# Altium PCB rf_main.PcbDoc (part 1 of 3)
Units mil, origin at the board's own origin, x right, y up, seen from the top; angles counter-clockwise.
Board outline 7331.84 x 2609.86 mil, 2 copper layers (Top Layer, Bottom Layer); 310 components, 184 nets, 868 pads, 739 vias.
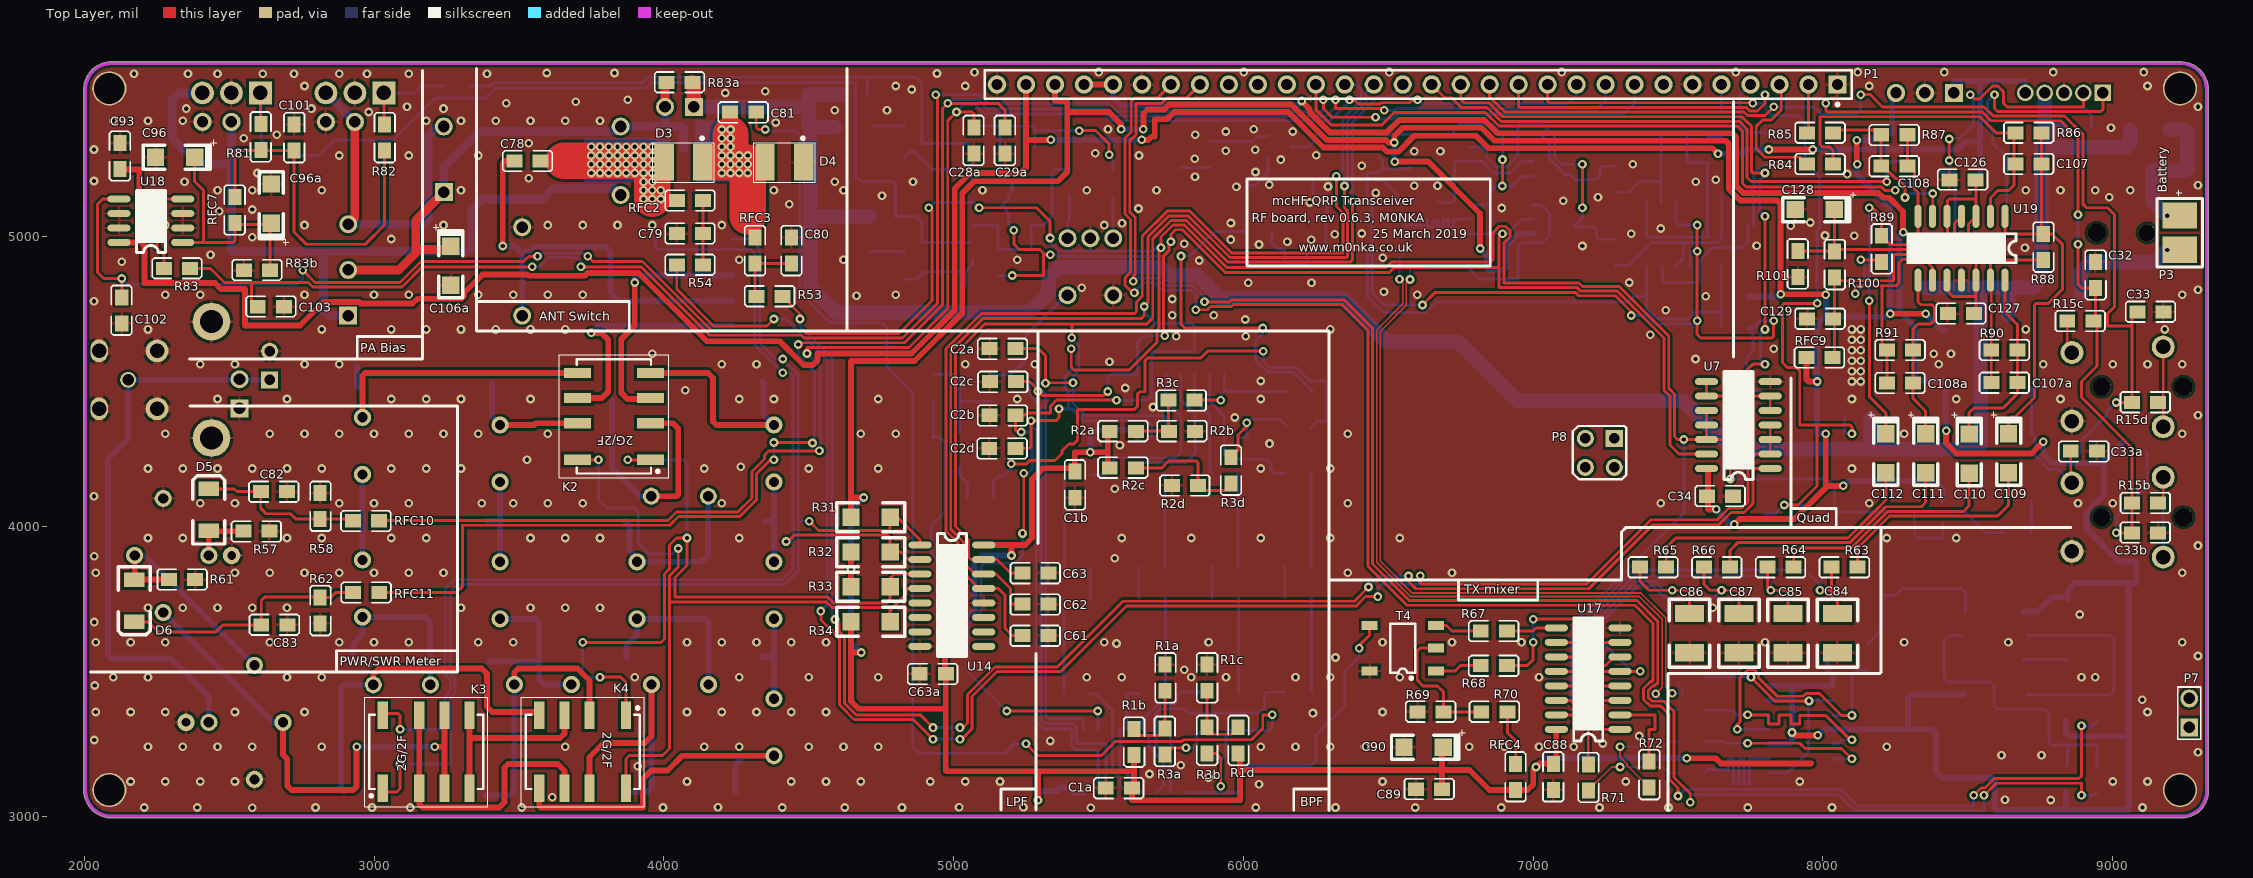
[diagram p0: Top Layer view]
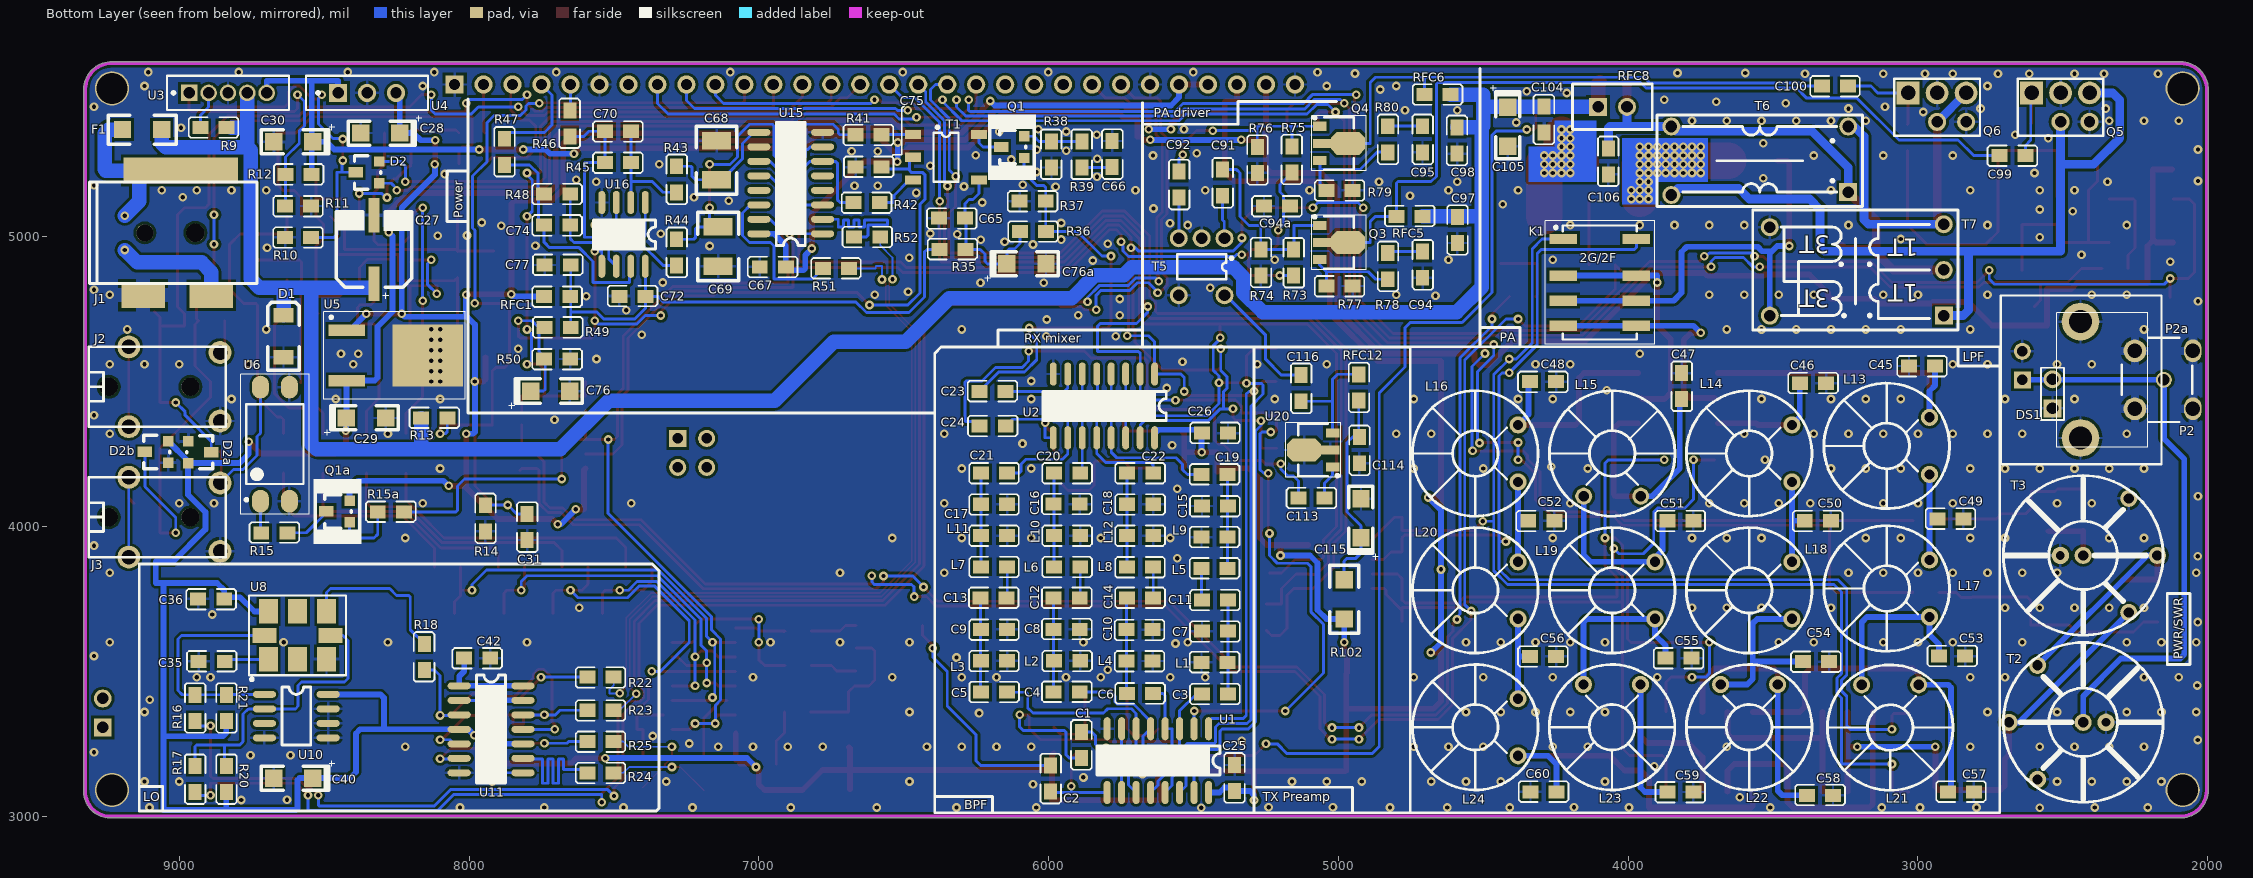
[diagram p1: Bottom Layer view, seen from below]

## Layer stack, top to bottom
Top Solder: solder mask 0.4, Solder Resist, Dk 3.5
Top Layer: signal copper 1.4
Dielectric1: dielectric 12.6, FR-4, Dk 4.8
Bottom Layer: signal copper 1.4
Bottom Solder: solder mask 0.4, Solder Resist, Dk 3.5

## Board outline
1998.08,3088.83 cw(c2004,3088.94) 1998.1,3089.47 cw(c2004,3090) 1998.08,3090 1998.08,5505.58 cw(c2094.65,5507.35) 2092.83,5603.92 cw(c2092.94,5598) 2093.36,5603.9 2093.36,5603.91 cw(c2094,5598.02) 2094,5603.94 9231.64,5603.94 cw(c9231.64,5598.02) 9232.01,5603.93 cw(c9233.35,5507.35) 9329.92,5509.17 cw(c9324,5509.06) 9329.92,5509.06 9329.92,3083.3 cw(c9324,3083.3) 9329.81,3082.14 cw(c9238.38,3085.55) 9240.27,2994.08 cw(c9238.38,3085.55) 9240.11,2994.08 cw(c9240,3000) 9240,2994.08 9240.05,2994.08 ccw(c9240.05,3000) 9240.27,2994.08 9240.05,2994.08 2096.42,2994.08 ccw(c2094.65,3090.65) 2096.47,2994.08 2096.42,2994.08 cw(c2094.65,3090.65)

## Design rules (kind name [scope] priority, off if disabled: settings)
Clearance Clearance_1 [InPolygon] p1: gap=9 ignorepadtopadclearanceinfootprint=FALSE except(0: Arc-Hole Track-Hole SMDPad-Hole THPad-Hole Via-Hole Fill-Hole Poly-Hole Region-Hole Text-Hole)
Clearance [All] p2: gap=6 ignorepadtopadclearanceinfootprint=FALSE except(0: Arc-Hole Track-Hole SMDPad-Hole THPad-Hole Via-Hole Fill-Hole Poly-Hole Region-Hole Text-Hole)
DiffPairsRouting [All] p1: maxlimit=300 minlimit=6 mostfreqgap=6 toplayer_minwidth=6 toplayer_maxwidth=6 toplayer_prefwidth=6 bottomlayer_minwidth=6 bottomlayer_maxwidth=6 bottomlayer_prefwidth=6 maxuncoupledlength=150
HoleSize [All] p1: absolutevalues=TRUE maxlimit=1000 minlimit=1 maxpercent=80.000 minpercent=20.000
MatchedLengths "Schematic Matched Net Lengths_3" [InNet('TX_CLK_N')] p1: tolerance=150 checknetsindiffpair=TRUE checkdiffpairvsdiffpair=FALSE checkxsignals=FALSE checkothers=FALSE
MatchedLengths "Schematic Matched Net Lengths_2" [InNet('TX_CLK_P')] p2: tolerance=150 checknetsindiffpair=TRUE checkdiffpairvsdiffpair=FALSE checkxsignals=FALSE checkothers=FALSE
MatchedLengths "Schematic Matched Net Lengths_1" [InNet('RX_CLK_P')] p3: tolerance=150 checknetsindiffpair=TRUE checkdiffpairvsdiffpair=FALSE checkxsignals=FALSE checkothers=FALSE
MatchedLengths "Schematic Matched Net Lengths" [InNet('RX_CLK_N')] p4: tolerance=150 checknetsindiffpair=TRUE checkdiffpairvsdiffpair=FALSE checkxsignals=FALSE checkothers=FALSE
PolygonConnect PolygonConnect_vias [IsVia] p1: connectstyle=Direct reliefconductorwidth=10 reliefentries=4 polygonreliefangle="90 Angle" airgapwidth=10
PolygonConnect PolygonConnect_U5 [InComponent('U5')] p2: connectstyle=Direct reliefconductorwidth=60 reliefentries=4 polygonreliefangle="90 Angle" airgapwidth=10
PolygonConnect PolygonConnect_J1 [InComponent('J1')] p3: connectstyle=Relief reliefconductorwidth=50 reliefentries=4 polygonreliefangle="90 Angle" airgapwidth=10
PolygonConnect PolygonConnect_P2 [InComponent('P2')] p4: connectstyle=Relief reliefconductorwidth=30 reliefentries=4 polygonreliefangle="90 Angle" airgapwidth=10
PolygonConnect PolygonConnect_mounts [IsPad And (HoleDiameter = 2.7) Or (HoleDiameter = 106.299)] p5: connectstyle=Direct reliefconductorwidth=10 reliefentries=4 polygonreliefangle="90 Angle" airgapwidth=10
PolygonConnect [All] p6: connectstyle=Relief reliefconductorwidth=10 reliefentries=4 polygonreliefangle="90 Angle" airgapwidth=10
RoomDefinition "UI board interface" [InComponentClass('UI board interface')] p1: confinementstyle=ConfineOut formatcopy=TRUE lockcomponents=FALSE outline 8650,5664 9255,5664 9255,5813 8650,5813
RoomDefinition "TX Quad preamp" [InComponentClass('TX Quad preamp')] p2: confinementstyle=ConfineOut formatcopy=TRUE lockcomponents=FALSE outline 8020,5659 8619,5659 8619,5813 8020,5813
RoomDefinition "TX Preamp" [InComponentClass('TX Preamp')] p3: confinementstyle=ConfineOut formatcopy=TRUE lockcomponents=FALSE outline 4786,2687 5297,2687 5297,2948 4786,2948
RoomDefinition "TX Power Amplifier" [InComponentClass('TX Power Amplifier')] p4: confinementstyle=ConfineOut formatcopy=TRUE lockcomponents=FALSE outline 2385,5634 4293,5634 4293,5864 2385,5864
RoomDefinition "TX Mixer" [InComponentClass('TX Mixer')] p5: confinementstyle=ConfineOut formatcopy=TRUE lockcomponents=FALSE outline 7634,2736 8354,2736 8354,2963 7634,2963
RoomDefinition "SWR/Power meter" [InComponentClass('SWR/Power meter')] p6: confinementstyle=ConfineOut formatcopy=TRUE lockcomponents=FALSE outline 2013,2706 2713,2706 2713,2952 2013,2952
RoomDefinition "RX Detector" [InComponentClass('RX Detector')] p7: confinementstyle=ConfineOut formatcopy=TRUE lockcomponents=FALSE outline 5637,5661 6584,5661 6584,5837 5637,5837
RoomDefinition "Lowpass filters" [InComponentClass('Lowpass filters')] p8: confinementstyle=ConfineOut formatcopy=TRUE lockcomponents=FALSE outline 2753,2685 4753,2685 4753,2952 2753,2952
RoomDefinition "Local Oscillator" [InComponentClass('Local Oscillator')] p9: confinementstyle=ConfineOut formatcopy=TRUE lockcomponents=FALSE outline 8453,2732 9058,2732 9058,2962 8453,2962
RoomDefinition "Bandpass filters" [InComponentClass('Bandpass filters')] p10: confinementstyle=ConfineOut formatcopy=TRUE lockcomponents=FALSE outline 5437,2682 6192,2682 6192,2947 5437,2947
RoomDefinition "Antenna Switching" [InComponentClass('Antenna Switching')] p11: confinementstyle=ConfineOut formatcopy=TRUE lockcomponents=FALSE outline 4536,5634 4928,5634 4928,5847 4536,5847
RoutingVias [All] p1: holewidth=15 width=30 viastyle="Through Hole" minholewidth=28 minwidth=50 maxholewidth=28 maxwidth=50
SilkToSolderMaskClearance SilkscreenOverComponentPads [IsPad] p1: minsilkscreentomaskgap=10 clearancetoexposedcopper=TRUE
SolderMaskExpansion SolderMaskExpansion_1 [IsVia] p1: expansion=-15
SolderMaskExpansion [All] p2: expansion=4
Width Width_RF [(InNet('TX_PA_OUT'))OR(InNet('NetK1_3'))OR(InNet('NetK1_2'))OR(InNet('NetK1_4'))OR(InNet('NetC45_1'))OR(InNet('NetC48_2'))OR(InNet('NetC46_1'))OR(InNet('NetC47_2'))OR(InNet('NetC49_1'))OR(InNet('NetC50_2'))OR(InNet('NetC51_2'))OR(InNet('NetC52_2'))OR(InNet('NetC53_1'))OR(InNet('NetC54_2'))OR(InNet('NetC55_2'))OR(InNet('NetC56_2'))OR(InNet('NetC57_1'))OR(InNet('NetC58_1'))OR(InNet('NetC59_2'))OR(InNet('NetC60_2'))OR(InNet('NetK3_4'))OR(InNet('NetK3_2'))OR(InNet('NetK3_3'))OR(InNet('ANT_MET'))OR(InNet('ANT'))OR(InNet('NetD6_1'))OR(InNet('NetD5_1'))OR(InNet('NetC78_2'))OR(InNet('NetR27_1'))] p1: maxlimit=20 minlimit=20 preferedwidth=20
Width Width_PIN [(InNet('NetC78_1'))OR(InNet('NetC81_2'))] p2: maxlimit=125 minlimit=125 preferedwidth=125
Width Width_PA [(InNet('NetC106_2'))OR(InNet('NetQ5_3'))OR(InNet('NetQ6_3'))] p3: maxlimit=30 minlimit=30 preferedwidth=30
Width Width_VCC_12V [(InNet('VCC_12V'))OR(InNet('NetF1_2'))OR(InNet('NetJ1_3'))] p4: maxlimit=50 minlimit=50 preferedwidth=50
Width Width_VCC_8V [(InNet('VCC_8V'))] p5: maxlimit=20 minlimit=20 preferedwidth=20
Width Width_VCC_5V [(InNet('VCC_5V'))] p6: maxlimit=20 minlimit=20 preferedwidth=20
Width Width_VCC_3V [(InNet('VCC_3V'))] p7: maxlimit=20 minlimit=20 preferedwidth=20
Width [All] p8: maxlimit=10 minlimit=10 preferedwidth=10
27 further rules are at their usual default settings.

## Classes and differential pairs
component class "TX Preamp": C113 C114 C115 C116 R102 RFC12 U20
component class "Antenna Switching": C78 C79 C80 C81 D3 D4 R53 R54 RFC2 RFC3
component class "SWR/Power meter": C82 C83 D5 D6 DS1 R57 R58 R61 R62 RFC10 RFC11 T2 T3
component class "Bandpass filters": 32 C1 C1a C1b C2 C2a C2b C2c C2d C3 C4 C5 C6 C7 C8 C9 C10 C11 C12 C13 C14 C15 C16 C17 C18 C19 C20 C21 C22 C23 C24 C25 C26 L1 L2 L3 L4 L5 L6 L7 L8 L9 L10 L11 L12 R1a R1b R1c R1d R2a R2b R2c R2d R3a R3b R3c R3d U1 U2
component class "Local Oscillator": C35 C36 C40 C42 P8 R16 R17 R18 R20 R21 R22 R23 R24 R25 U8 U10 U11
component class "Lowpass filters": C45 C46 C47 C48 C49 C50 C51 C52 C53 C54 C55 C56 C57 C58 C59 C60 C61 C62 C63 C63a K1 K2 K3 K4 L13 L14 L15 L16 L17 L18 L19 L20 L21 L22 L23 L24 R31 R32 R33 R34 U14
component class "RX Detector": C65 C66 C67 C68 C69 C70 C72 C74 C75 C76 C76a C77 Q1 R35 R36 R37 R38 R39 R41 R42 R43 R44 R45 R46 R47 R48 R49 R50 R51 R52 RFC1 T1 U15 U16
component class "TX Mixer": C84 C85 C86 C87 C88 C89 C90 R63 R64 R65 R66 R67 R68 R69 R70 R71 R72 RFC4 T4 U17
component class "TX Power Amplifier": C91 C92 C93 C94 C94a C95 C96 C96a C97 C98 C99 C100 C101 C102 C103 C104 C105 C106 C106a Q3 Q4 Q5 Q6 R73 R74 R75 R76 R77 R78 R79 R80 R81 R82 R83 R83a R83b RFC5 RFC6 RFC7 RFC8 T5 T6 T7 U18
component class "TX Quad preamp": C107 C107a C108 C108a C109 C110 C111 C112 C126 C127 C128 C129 R84 R85 R86 R87 R88 R89 R90 R91 R100 R101 RFC9 U19
component class "UI board interface": C27 C28 C28a C29 C29a C30 C31 C32 C33 C33a C33b C34 D1 D2 D2a D2b F1 J1 J2 J3 P1 P2 P2a P3 P7 Q1a R9 R10 R11 R12 R13 R14 R15 R15a R15b R15c R15d U3 U4 U5 U6 U7
differential pair TX_CLK: +TX_CLK_P -TX_CLK_N
differential pair RX_CLK: +RX_CLK_P -RX_CLK_N

## Components (designator, comment, footprint, x,y, rotation, side; value= is the part's Value field where it differs from the comment)
C1 "100nF" 0805-Pro 5886,3200 r90 bottom
C1a "100nF" 0805-Pro 5616,3098 r180 top
C1b "100nF" 0805-Pro 5418,4190 r270 top
C2 "100nF" 0805-Pro 5994,3176 r270 bottom
C2a "100nF" 0805-Pro 5215.14,4613.78 r180 top
C2b "100nF" 0805-Pro 5215,4384 r180 top
C2c "100nF" 0805-Pro 5216,4500 r180 top
C2d "100nF" 0805-Pro 5214,4270 r180 top
C3 "100nF" 0805-Pro 5380.07,3422.86 r0 bottom
C4 "100nF" 0805-Pro 5983.49,3428.86 r180 bottom
C5 "100nF" 0805-Pro 6234,3428 r180 bottom
C6 "100nF" 0805-Pro 5730.63,3423.08 r180 bottom
C7 "1.5nF" 0805-Pro 5380.07,3638.86 r0 bottom
C8 "820" 0805-Pro 5983.49,3644.86 r180 bottom
C9 "390" 0805-Pro 6142.07,3644.86 r0 bottom
C10 "180" 0805-Pro 5640,3644 r0 bottom
C11 "680" 0805-Pro 5380.07,3746.86 r0 bottom
C12 "390" 0805-Pro 5983.49,3752.86 r180 bottom
C13 "180" 0805-Pro 6235.49,3752.86 r180 bottom
C14 "82" 0805-Pro 5730.63,3753.08 r180 bottom
C15 "1.5nF" 0805-Pro 5380.07,4070.86 r0 bottom
C16 "820" 0805-Pro 5983.49,4076.86 r180 bottom
C17 "390" 0805-Pro 6142.07,4076.86 r0 bottom
C18 "180" 0805-Pro 5638.07,4076.86 r0 bottom
C19 "100nF" 0805-Pro 5473.49,4178.86 r180 bottom
C20 "100nF" 0805-Pro 5890.07,4184.86 r0 bottom
C21 "100nF" 0805-Pro 6142.07,4184.86 r0 bottom
C22 "100nF" 0805-Pro 5638.07,4184.86 r0 bottom
C23 "100nF" 0805-Pro 6240,4466 r180 bottom
C24 "100nF" 0805-Pro 6238.92,4346 r180 bottom
C25 "100nF" 0805-Pro 5358,3086 r90 bottom
C26 "100nF" 0805-Pro 5472,4322 r180 bottom
C27 "100uF" CAP_ALUM_1 8328,4956 r90 bottom
C28 "10uF" 1206_Elec_Cap_N 8238,5358 r0 bottom
C28a "1nF" 0805-Pro 5070,5286 r90 top
C29 "10uF" 1206_Elec_Cap_N 8424,4374 r180 bottom
C29a "1nF" 0805-Pro 5178,5286 r90 top
C30 "22uF" 1206_Elec_Cap_N 8538,5328 r0 bottom
C31 "10nF" 0805-Pro 7800,4044 r270 bottom
C32 "1nF" 0805-Pro 8940,4914 r270 top
C33 "1nF" 0805-Pro 9084,4740 r0 top
C33a "1nF" 0805-Pro 8946,4260 r180 top
C33b "1nF" 0805-Pro 9066,3978 r0 top
C34 "100nF" 0805-Pro 7599,4104 r0 top
C35 "10nF" 0805-Pro 8934,3534 r180 bottom
C36 "100nF" 0805-Pro 8844,3750 r0 bottom
C40 "10uF" 1206_Elec_Cap_N 8538,3132 r0 bottom
C42 "100nF" 0805-Pro 7926,3546 r0 bottom
C45 "470" 0805-Pro 2940,4554 r0 bottom
C46 "270" 0805-Pro 3408,4494 r180 bottom
C47 "180" 0805-Pro 3816,4530 r270 bottom
C48 "100pF" 0805-Pro 4248,4500 r0 bottom
C49 "1.2nF" 0805-Pro 2934,4026 r180 bottom
C50 "680" 0805-Pro 3300,4020 r0 bottom
C51 "390" 0805-Pro 3774,4020 r0 bottom
C52 "220pF" 0805-Pro 4254,4020 r0 bottom
C53 "1.2nF" 0805-Pro 2928,3552 r180 bottom
C54 "680" 0805-Pro 3306,3534 r0 bottom
C55 "390" 0805-Pro 3780,3546 r0 bottom
C56 "220pF" 0805-Pro 4248,3552 r0 bottom
C57 "470" 0805-Pro 2898,3084 r180 bottom
C58 "270" 0805-Pro 3384,3072 r180 bottom
C59 "180" 0805-Pro 3774,3084 r0 bottom
C60 "100pF" 0805-Pro 4338,3084 r180 bottom
C61 "100nF" 0805-Pro 5328,3624 r180 top
C62 "100nF" 0805-Pro 5328,3732 r180 top
C63 "100nF" 0805-Pro 5328,3840 r180 top
C63a "100nF" 0805-Pro 4974,3492 r180 top
C65 "100nF" 0805-Pro 6288,5064 r0 bottom
C66 "100nF" 0805-Pro 5781,5331 r270 bottom
C67 "100nF" 0805-Pro 6906,4896 r0 bottom
C68 "22nF" CAP_B 7146,5196 r90 bottom
C69 "22nF" CAP_B 7140,5034 r270 bottom
C70 "390" 0805-Pro 7440,5364 r0 bottom
C72 "100nF" 0805-Pro 7482,4794 r180 bottom
C74 "390" 0805-Pro 7650,5040 r0 bottom
C75 "100nF" 0805-Pro 6667,5240 r180 bottom
C76 "10uF" 1206_Elec_Cap_N 7788,4467 r180 bottom
C76a "10uF" 1206_Elec_Cap_N 6145,4906 r180 bottom
C77 "100nF" 0805-Pro 7740,4902 r180 bottom
C78 "1nF" 0805-Pro 3576,5262 r180 top
C79 "100nF" 0805-Pro 4044,5010 r0 top
C80 "100nF" 0805-Pro 4440,4998 r270 top
C81 "100nF" 0805-Pro 4320,5430 r180 top
C82 "2.2uF" 0805-Pro 2700.14,4120.78 r180 top
C83 "2.2uF" 0805-Pro 2610,3660 r0 top
C84 "22nF" CAP_B 8050,3700 r270 top
C85 "22nF" CAP_B 7880,3700 r270 top
C86 "22nF" CAP_B 7540,3700 r270 top
C87 "22nF" CAP_B 7710,3700 r270 top
C88 "100nF" 0805-Pro 7070,3090 r90 top
C89 "100nF" 0805-Pro 6595,3093 r0 top
C90 "10uF" 1206_Elec_Cap_N 6690,3238 r180 top
C91 "100nF" 0805-Pro 5400,5232 r270 bottom
C92 "100nF" 0805-Pro 5550,5226 r270 bottom
C93 "100nF" 0805-Pro 2124,5232 r90 top
C94 "47nF" 0805-Pro 4709.78,4949.14 r270 bottom
C94a "100nF" 0805-Pro 5166,5106 r0 bottom
C95 "47nF" 0805-Pro 4710,5382 r270 bottom
C96 "22uF" 1206_Elec_Cap_N 2382,5274 r180 top
C96a "22uF" 1206_Elec_Cap_N 2646,5046 r90 top
C97 "100nF" 0805-Pro 4589.78,5069.14 r270 bottom
C98 "100nF" 0805-Pro 4590,5286 r90 bottom
C99 "100nF" 0805-Pro 2628,5280 r0 bottom
C100 "100nF" 0805-Pro 3240,5520 r0 bottom
C101 "100nF" 0805-Pro 2724,5388 r270 top
C102 "100nF" 0805-Pro 2129.78,4700 r90 top
C103 "100nF" 0805-Pro 2598,4758 r0 top
C104 "100nF" 0805-Pro 4290,5358 r90 bottom
C105 "10uF" 1206_Elec_Cap_N 4416,5448 r270 bottom
C106 "100nF" 0805-Pro 4068,5214 r90 bottom
C106a "22uF" 1206_Elec_Cap_N 3264,4968 r270 top
C107 "100pF" 0805-Pro 8664,5250 r0 top
C107a "100pF" 0805-Pro 8672,4497 r180 top
C108 "100pF" 0805-Pro 8292,5244 r180 top
C108a "100pF" 0805-Pro 8312,4496 r180 top
C109 "10uF" 1206_Elec_Cap_N 8640,4321 r270 top
C110 "10uF" 1206_Elec_Cap_N 8504,4320 r270 top
C111 "10uF" 1206_Elec_Cap_N 8354,4321 r270 top
C112 "10uF" 1206_Elec_Cap_N 8217,4321 r270 top
C113 "100nF" 0805-Pro 5047,4099 r0 bottom
C114 "100nF" 0805-Pro 4928,4309 r270 bottom
C115 "10uF" 1206_Elec_Cap_N 4922,3960 r90 bottom
C116 "100nF" 0805-Pro 5129,4523 r270 bottom
C126 "100nF" 0805-Pro 8436,5196 r0 top
C127 "100nF" 0805-Pro 8430,4734 r0 top
C128 "10uF" 1206_Elec_Cap_N 8040,5094 r180 top
C129 "100nF" 0805-Pro 7944,4716 r0 top
D1 "PMEG6010CEH" SOD87 8640,4584 r90 bottom
D2 "BAT54A" SOT-23 8310,5184 r90 bottom
D2a "BAV99" SOT-23 8970,4294 r270 bottom
D2b "BAV99" SOT-23 9038,4219 r90 bottom
D3 "MA4P7102F" 1072T 4068,5256 r180 top
D4 "MA4P7102F" 1072T 4416,5256 r180 top
D5 "PMEG6010CEH" SOD87 2430,3984 r90 top
D6 "PMEG6010CEH" SOD87 2172,3816 r270 top
DS1 "16/30HB" SIP2 2535.89,4407.39 r90 bottom
F1 "MC12CT" 1206 9060,5370 r0 bottom
J1 "FC68148S" POWERJACK 9018,4998 r180 bottom locked
J2 "MX-387GL" MX-387GL_new1 9312,4482 r90 bottom locked
J3 "MX-387GL" MX-387GL_new1 9312,4032 r90 bottom locked
K1 "G6KU-2FY 3DC" OMRON_2FY 4098,4842 r180 bottom locked
K2 "G6KU-2FY 3DC" OMRON_2FY 3828,4380 r180 top locked
K3 "G6KU-2FY 3DC" OMRON_2FY 3180,3222 r90 top locked
K4 "G6KU-2FY 3DC" OMRON_2FY 3720,3222 r270 top locked
L1 "2.2uH" 0805-Pro 5473.49,3530.86 r180 bottom
L2 "1uH" 0805-Pro 5890.07,3536.86 r0 bottom
L3 "0.47uH" 0805-Pro 6142.07,3536.86 r0 bottom
L4 "0.33uH" 0805-Pro 5640,3536 r0 bottom
L5 "4.7uH" 0805-Pro 5473.49,3854.86 r180 bottom
L6 "2.2uH" 0805-Pro 5890.07,3860.86 r0 bottom
L7 "1uH" 0805-Pro 6142.07,3860.86 r0 bottom
L8 "0.68uH" 0805-Pro 5638.29,3860 r0 bottom
L9 "2.2uH" 0805-Pro 5473.49,3962.86 r180 bottom
L10 "1uH" 0805-Pro 5890.07,3968.86 r0 bottom
L11 "0.47uH" 0805-Pro 6142.07,3968.86 r0 bottom
L12 "0.33uH" 0805-Pro 5638.07,3968.86 r0 bottom
L13 "T37-2" LPF_IND 3108,4278 r270 bottom
L14 "T37-2" LPF_IND 3582.68,4251.97 r270 bottom locked
L15 "T37-2" LPF_IND 4055.12,4251.97 r0 bottom locked
L16 "T37-2" LPF_IND 4527.56,4251.97 r270 bottom locked
L17 "T37-2" LPF_IND 3108,3786 r270 bottom
L18 "T37-2" LPF_IND 3582.68,3779.53 r270 bottom locked
L19 "T37-2" LPF_IND 4055.12,3779.53 r270 bottom locked
L20 "T37-2" LPF_IND 4527.56,3779.53 r270 bottom locked
L21 "T37-2" LPF_IND 3096,3306 r180 bottom
L22 "T37-2" LPF_IND 3582.68,3307.09 r180 bottom locked
L23 "T37-2" LPF_IND 4056,3307.09 r180 bottom locked
L24 "T37-2" LPF_IND 4527.56,3307.09 r270 bottom locked
P1 "Header 30" HDR1X30 8050,5525 r180 top locked
P2 "BNC 13-60-2 DGZ" CON-SMA-RA-A 2151.57,4506 r0 bottom locked
P2a "BNC 13-60-2 DGZ" "BNC_RA CON" 2640,4506 r0 bottom locked
P3 "Battery" BATTERYTERMINAL 9231,5014 r0 top
P7 "Speaker" SIP2 9264,3306.14 r90 top locked
P8 "Header 2X2" HDR2X2 7230,4254 r0 top
Q1 "BFR93A" SOT-23-Pro 6084,5271 r90 bottom
Q1a "NDS356AP" SOT-23-Pro 8412,4014 r90 bottom
Q3 "DXT3150" SOT89L_new 4998,4980 r180 bottom
Q4 "DXT3150" SOT89L_new 4998,5322 r180 bottom
Q5 "RD16HHF1" TO-220RF_dual 2508,5496.06 r180 bottom locked
Q6 "RD16HHF1" TO-220RF_dual 2934,5496.06 r180 bottom locked
R1a "4.7K" 0805-Pro 5730,3524 r270 top
R1b "4.7K" 0805-Pro 5622,3302 r270 top
R1c "4.7K" 0805-Pro 5874,3524 r270 top
R1d "4.7K" 0805-Pro 5982,3308 r270 top
R2a "4.7K" 0805-Pro 5538,4328 r0 top
R2b "4.7K" 0805-Pro 5742,4328 r0 top
R2c "4.7K" 0805-Pro 5538,4202 r0 top
R2d "4.7K" 0805-Pro 5844,4142 r180 top
R3a "100K" 0805-Pro 5730,3212 r90 top
R3b "100K" 0805-Pro 5874,3308 r270 top
R3c "100K" 0805-Pro 5832,4436 r180 top
R3d "100K" 0805-Pro 5958,4148 r90 top
R9 "15K" 0805-Pro 8928,5376 r180 bottom
R10 "4.7K" 0805-Pro 8544,4998 r0 bottom
R11 "1K" 0805-Pro 8544,5106 r0 bottom
R12 "5.6K" 0805-Pro 8634,5214 r180 bottom
R13 "15K" 0805-Pro 8166,4374 r180 bottom
R14 "3.9K" 0805-Pro 7944,4074 r270 bottom
R15 "1K" 0805-Pro 8718,3978 r180 bottom
R15a "4.7K" 0805-Pro 8316,4050 r180 bottom
R15b "100" 0805-Pro 9066,4080 r0 top
R15c "100" 0805-Pro 8934,4710 r180 top
R15d "100" 0805-Pro 9066,4428 r0 top
R16 "100" 0805-Pro 8946,3420 r270 bottom
R17 "100" 0805-Pro 8946,3174 r270 bottom
R18 "100" 0805-Pro 8154,3504 r90 bottom
R20 "4.7K" 0805-Pro 8838,3174 r270 bottom
R21 "4.7K" 0805-Pro 8838,3420 r270 bottom
R22 "0" 0805-Pro 7500,3480 r0 bottom locked
R23 "0" 0805-Pro 7500,3366 r0 bottom locked
R24 "0" 0805-Pro 7500,3150 r0 bottom locked
R25 "0" 0805-Pro 7500,3258 r0 bottom locked
R31 "27" 1206 4782,4032 r180 top
R32 "27" 1206 4782,3912 r180 top
R33 "27" 1206 4782,3792 r180 top
R34 "27" 1206 4782,3672 r180 top
R35 "100" 0805-Pro 6378,4956 r180 bottom
R36 "4.7K" 0805-Pro 6100,5017 r180 bottom
R37 "1.5K" 0805-Pro 6009,5123 r0 bottom
R38 "10" 0805-Pro 5990,5238 r90 bottom
R39 "10" 0805-Pro 5885,5238 r90 bottom
R41 "100" 0805-Pro 6576,5352 r0 bottom
R42 "100" 0805-Pro 6582,5118 r0 bottom
R43 "100" 0805-Pro 7284,5244 r270 bottom
R44 "100" 0805-Pro 7284,4992 r270 bottom
R45 "2.2k" 0805-Pro 7440,5256 r0 bottom
R46 "100" 0805-Pro 7652,5345 r90 bottom
R47 "100" 0805-Pro 7877,5247 r90 bottom
R48 "2.2k" 0805-Pro 7650,5148 r0 bottom
R49 "1K" 0805-Pro 7740,4686 r180 bottom
R50 "1K" 0805-Pro 7650,4578 r0 bottom
R51 "100" 0805-Pro 6780,4890 r180 bottom locked
R52 "100" 0805-Pro 6672,4998 r180 bottom locked
R53 "220" 0805-Pro 4319.14,4793.78 r0 top
R54 "3.9K" 0805-Pro 4044,4902 r0 top
R57 "47" 0805-Pro 2640,3984 r180 top
R58 "2.2k" 0805-Pro 2814,4116 r270 top
R61 "47" 0805-Pro 2292,3816 r0 top
R62 "2.2k" 0805-Pro 2814,3756 r270 top
R63 "47" 0805-Pro 8120,3860 r180 top
R64 "47" 0805-Pro 7900,3860 r180 top
R65 "47" 0805-Pro 7460,3860 r180 top
R66 "47" 0805-Pro 7680,3860 r180 top
R67 "47" 0805-Pro 6910,3640 r180 top
R68 "47" 0805-Pro 6910,3520 r180 top
R69 "2.2k" 0805-Pro 6600,3360 r0 top
R70 "2.2k" 0805-Pro 6820,3360 r0 top
R71 "100" 0805-Pro 7190,3180 r270 top locked
R72 "100" 0805-Pro 7400,3190 r270 top locked
R73 "2.2k" 0805-Pro 5154.86,4956.22 r270 bottom
R74 "2.2k" 0805-Pro 5268,4957.08 r270 bottom
R75 "2.2k" 0805-Pro 5160,5220 r90 bottom
R76 "2.2k" 0805-Pro 5280.22,5310.86 r270 bottom
R77 "47" 0805-Pro 4950,4830 r0 bottom
R78 "4.7" 0805-Pro 4830,4944 r270 bottom
R79 "47" 0805-Pro 4950,5160 r0 bottom
R80 "4.7" 0805-Pro 4830,5382 r270 bottom
R81 "220" 0805-Pro 2610,5298 r90 top
R82 "220" 0805-Pro 3036,5388 r270 top
R83 "2.2k" 0805-Pro 2274,4890 r0 top
R83a "10" 0805-Pro 4008,5532 r0 top
R83b "1K" 0805-Pro 2550,4884 r0 top
R84 "10k" 0805-Pro 7944,5250 r0 top
R85 "10k" 0805-Pro 7944,5358 r0 top
R86 "10k" 0805-Pro 8664,5358 r0 top
R87 "10k" 0805-Pro 8292,5352 r180 top
R88 "10k" 0805-Pro 8760,5010 r270 top
R89 "10k" 0805-Pro 8202,5004 r270 top
R90 "10k" 0805-Pro 8580,4608 r0 top
R91 "10k" 0805-Pro 8220,4608 r0 top
R100 "2.2k" 0805-Pro 8040,4950 r270 top
R101 "2.2k" 0805-Pro 7914,4860 r90 top
R102 "27" 1206 4980,3680 r90 bottom
RFC1 "47uH" 0805-Pro 7650,4794 r0 bottom
RFC2 "47uH" 0805-Pro 4044,5124 r0 top
RFC3 "47uH" 0805-Pro 4314,4998 r270 top
RFC4 "47uH" 0805-Pro 6940,3090 r90 top
RFC5 "47uH" 0805-Pro 4800,5070 r180 bottom
RFC6 "47uH" 0805-Pro 4704,5490 r180 bottom
RFC7 "47uH" 0805-Pro 2520,5046 r90 top
RFC8 "BN43-2402 1t choke" F_Bead 4104,5448 r180 bottom
RFC9 "47uH" 0805-Pro 8034,4584 r180 top
RFC10 "47uH" 0805-Pro 3018,4020 r180 top
RFC11 "47uH" 0805-Pro 3019,3773 r180 top
RFC12 "47uH" 0805-Pro 4930,4526 r270 bottom
T1 "CX2074NL" SOP5_NEW1 6354,5274 r270 bottom
T2 "FT50-43 10:1 ratio" "SWR_TR _new" 2430,3324 r90 bottom locked
T3 "FT50-43 10:1 ratio" "SWR_TR _new" 2430,3900 r270 bottom locked
T4 "CX2074NL" SOP5_NEW1 6550,3580 r90 top
T5 "Custom BN43-2402" SOP5_NEW1thr 5472,4896 r0 bottom
T6 "BN43-202" PA_TRM_b1 3546,5262 r0 bottom
T7 "BN43-202 transformer" PA_TRM_4m 3216,4836 r0 bottom
U1 "SN74CBT3253C" SO-16-Pro 5448,3302 r270 bottom
U2 "SN74CBT3253C" SO-16-Pro 5634,4526 r270 bottom
U3 "LM2941CT" TO-220-5 8832,5496.06 r180 bottom locked
U4 "MC7805BTG" TO-220 8352,5496.06 r180 bottom locked
U5 "KA78RM33RTF" TO-252 8202,4590 r180 bottom
U6 "ISP817XSM" SMDIP-4_new1 8670,4284 r90 bottom
U7 "74HCT02" SO-14-Pro 7818,4200 r180 top
U8 "SI570" SI570_m 8592,3624 r180 bottom
U10 "MCP9801" SO-8 8706.17,3420.61 r180 bottom
U11 "PO74G74A" SO-14-Pro 8034,3450 r180 bottom locked
U14 "SN74LS145D" SO-16-Pro 4884,3936 r0 top
U15 "SN74CBT3253C" SO-16-Pro 6780,5010 r0 bottom
U16 "OPA2350UA" SO-8-Pro 7392,5118 r270 bottom
U17 "SN74CBT3253C" SO-16-Pro 7300,3300 r180 top locked
U18 "LM2931CDG" SO-8-Pro 2340,4980 r180 top
U19 "TLV2464CD" SO-14-Pro 8628,5070 r270 top
U20 "HMC482ST89E" SOT89L_new 5087,4264 r0 bottom

## Footprints (in the part's own frame and the unit in brackets; to place one, negate y for a bottom-side part, rotate by r counter-clockwise, add the part's x,y. Pads: shape width x height; smd on the part's side, far side on the other; paste and mask are expansions set on the pad)
0805-Pro [mil]
  rect 55x45 smd: 1(0.86,0.22) 2(90.86,0.22)
  silkscreen extent -39,-34 132,36
1072T [mm] "1072 MELF package"
  rect 1.7x3.2 smd: 1(-1.7,0) 2(1.7,0)
  silkscreen extent -2.7,-2.25 2.7,1.75
1206 [mil]
  rect 60x60 smd: 1(0.86,0.22) 2(135.86,0.22)
  silkscreen extent -49,-50 186,50
1206_Elec_Cap_N [mil]
  rect 60x60 smd: 1(0.86,0.22) 2(135.86,0.22)
  silkscreen extent -75,-60 179,42
BATTERYTERMINAL [mil]
  rect 120x90 smd: 1(0,59.06) 2(0,-59.06)
  silkscreen extent -79,-118 79,147
"BNC_RA CON" [mm] "Connector; BNC Elbow"
  rect 1.5x1.5 hole 0.9: 1(0,0)
  round 3.3 hole 2: 2(-5.1,-5.1) 2(-5.1,5.1)
  round 1.5 hole 0.9: 2(0,-2.5)
  silkscreen extent -12.2,-7.4 1.9,7.4
CAP_ALUM_1 [mm]
  rect 3x1 smd: 1(-3,0) 2(3,0)
  silkscreen extent -4.32,-3.3 3.33,3.3
CAP_B [mil]
  rect 60x100 smd: 1(0.39,-0.12) 2(135.39,-0.12)
  silkscreen extent -50,-70 185,70
CON-SMA-RA-A [mm] "Connector, SMA Female, 5-Lead, Thru-Hole, Right-Angle, Body 7x7mm"
  round 1.397 hole 1.016: 1(0,0)
  oval 1.524x2 hole 1.27: 2(-2.54,-2.54) 2(-2.54,2.54)
  round 2 hole 1.27: 2(2.54,-2.54) 2(2.54,2.54)
  silkscreen extent -2.5,-3.7 3.7,3.7
F_Bead [mil] "Ferrite bead choke, 1t, BN43-2402"
  rect 62x62 hole 40: 1(0,0)
  round 62 hole 40: 2(100,0)
  silkscreen extent -89,-79 187,79
HDR1X30 [mm] "Connector; Header; 30 Position"
  rect 1.6x1.6 hole 0.99: 1(0,0)
  round 1.6 hole 0.99: 2(2.54,0) 3(5.08,0) 4(7.62,0) 5(10.16,0) 6(12.7,0) 7(15.24,0) 8(17.78,0) 9(20.32,0) 10(22.86,0) 11(25.4,0) 12(27.94,0) 13(30.48,0) 14(33.02,0) 15(35.56,0) 16(38.1,0) 17(40.64,0) 18(43.18,0) 19(45.72,0) 20(48.26,0) 21(50.8,0) 22(53.34,0) 23(55.88,0) 24(58.42,0) 25(60.96,0) 26(63.5,0) 27(66.04,0) 28(68.58,0) 29(71.12,0) 30(73.66,0)
  silkscreen extent -1.25,-1.25 74.75,1.87
HDR2X2 [mm] "Connector; Header; 2x2 Position"
  rect 1.5x1.5 hole 0.9: 1(1.27,1.27)
  round 1.5 hole 0.9: 2(1.27,-1.27) 3(-1.27,1.27) 4(-1.27,-1.27)
  silkscreen extent -2.36,-2.31 2.31,2.36
LPF_IND [mm] "T37-2 inductor"
  round 1.5 hole 0.9: 1(-2.5,3.75) 2(2.5,3.75)
  silkscreen extent -5.5,-5.5 5.5,5.5
MX-387GL_new1 [mm] "Pro Signal 3pin receptacle"
  round 1.6 hole 1.6 unplated: 0(0,-8.9) 0(0,-1.74)
  round 2 hole 1.27: R(3,-11.5) S(-3,-11.5) T(-3.5,-3.5) T(3.5,-3.5)
  silkscreen extent -3.5,-12 3.5,0
OMRON_2FY [mm] "Omron SMD relay"
  rect 2.4x0.9 smd: 1(-3.2,3.8) 2(-3.2,0.6) 3(-3.2,-1.6) 4(-3.2,-3.8) 5(3.2,-3.8) 6(3.2,-1.6) 7(3.2,0.6) 8(3.2,3.8)
  silkscreen extent -4.8,-5.4 4.8,5.4
PA_TRM_4m [mil] "transformer 2:3, 4 pin, BN43-202"
  rect 62x62 hole 40: 1(-305.12,108.27)
  round 62 hole 40: 2(-305.12,-49.21) 3(-305.12,-206.69) 4(295.28,108.27) 5(295.28,-196.85)
  silkscreen extent -354,-256 354,157
PA_TRM_b1 [mil] "bifilar transformer, 4 pin, BN43-202"
  rect 62x62 hole 40: 1(-305.12,108.27)
  round 62 hole 40: 2(305.12,118.11) 3(-305.12,-118.11) 4(305.12,-118.11)
  silkscreen extent -354,-157 354,157
POWERJACK [mm]
  round 1.5 hole 1.5: 0(-2.562,0.385)
  round 1.6 hole 1.6: 0(1.868,0.385)
  rect 10x2.286 smd: 1(0.589,5.846)
  rect 3.81x2.286 smd: 2(-2.713,-5.076) 3(3.256,-5.076)
  silkscreen extent -7.41,-4.06 7.26,4.83
SI570_m [mm] "PLL, SM; Body 7 x 5 mm (LxW)"
  rect 1.7x2.15 smd: 1(-2.54,-2.1) 2(0,-2.1) 3(2.54,-2.1) 4(2.54,2.1) 5(0,2.1) 6(-2.54,2.1)
  rect 2.1x1.3 smd: 7(-2.9,0) 8(2.9,0)
  silkscreen extent -4.25,-3.97 4.25,3.5
SIP2 [mil]
  rect 62x62 hole 40: 1(0.39,-0.11)
  round 62 hole 40: 2(100.39,-0.11)
  silkscreen extent -40,-40 140,40
SMDIP-4_new1 [mm] "4 pin SMD DIP, pitch 2.54mm"
  oval 2x1.5 smd: 1(-5,1.27) 2(-5,-1.27) 3(5,-1.27) 4(5,1.27)
  silkscreen extent -6.15,-3 6.15,3
SO-8 [mil]
  oval 80x24 smd: 1(0,0) 2(0,-50) 3(0,-100) 4(0,-150) 5(220,-150) 6(220,-100) 7(220,-50) 8(220,0)
  silkscreen extent 60,-175 160,25
SO-8-Pro [mil]
  oval 80x24 smd: 1(0,0) 2(0,-50) 3(0,-100) 4(0,-150) 5(220,-150) 6(220,-100) 7(220,-50) 8(220,0)
  silkscreen extent 60,-179 160,35
SO-14-Pro [mil]
  oval 80x24 smd: 1(0,0) 2(0,-50) 3(0,-100) 4(0,-150) 5(0,-200) 6(0,-250) 7(0,-300) 8(220,-300) 9(220,-250) 10(220,-200) 11(220,-150) 12(220,-100) 13(220,-50) 14(220,0)
  silkscreen extent 59,-335 161,38
SO-16-Pro [mil]
  oval 80x24 smd: 1(0,0) 2(0,-50) 3(0,-100) 4(0,-150) 5(0,-200) 6(0,-250) 7(0,-300) 8(0,-350) 9(220,-350) 10(220,-300) 11(220,-250) 12(220,-200) 13(220,-150) 14(220,-100) 15(220,-50) 16(220,0)
  silkscreen extent 59,-385 160,40
SOD87 [mil]
  rect 50x70 smd: 1(0.46,0.23) 2(145.46,0.23)
  silkscreen extent -45,-55 190,55
SOP5_NEW1 [mm] "Small Outline; 6 Leads (1 Absent); Body Width 6.9 mm; Pitch 2 mm"
  rect 0.8x1.4 smd: 1(-2,-2.9) 2(0,-2.9) 3(2,-2.9) 4(2,2.9) 6(-2,2.9)
  silkscreen extent -2.75,-1.1 2.15,1.1
SOP5_NEW1thr [mil] "Small Outline; 6 Leads (1 Absent); Body Width 6.9 mm; Pitch 2 mm"
  round 62 hole 40: 1(-78.74,-98.43) 2(0,-98.43) 3(78.74,-98.43) 4(78.74,98.43) 6(-78.74,98.43)
  silkscreen extent -108,-43 85,43
SOT89L_new [mm] "SOT89, 3-Leads, Body 4.5x2.4 mm, Pitch 1.5mm, Lead Span 4.1mm, IPC High Density"
  rect 1.2x0.8 smd: 1(-1.7,1.5) 3(-1.7,-1.5)
  rect 1.6x0.8 smd: 2(-1.5,0)
  oct 3x2 smd: 2(0.8,0)
  silkscreen extent -2.4,-2.4 2.4,2.4
SOT-23 [mil]
  rect 36x36 smd: 1(0.39,0.34) 2(75.39,0.34)
  rect 36x50 smd: 3(38.39,80.34)
  silkscreen extent -20,-5 95,85
SOT-23-Pro [mil]
  rect 36x36 smd: 1(0.39,0.34) 2(75.39,0.34)
  rect 36x50 smd: 3(38.39,80.34)
  silkscreen extent -75,-40 150,125
"SWR_TR _new" [mm] "FT50-43 10:1 transformer"
  round 1.5 hole 0.9: 1(-5,4) 2(5,4) 3(0,6.5) 4(0,0)
  round 1.524 hole 0.762: 5(0,-2)
  silkscreen extent -7,-7 7,7
TO-220 [mm] "TO, Thru-Hole, Vertical, Heatsink Mounted; 3 In-Line Leads; Pitch 2.54 mm"
  rect 1.6x1.6 hole 1: 1(-2.54,0)
  round 1.6 hole 1: 2(0,0) 3(2.54,0)
  silkscreen extent -5.35,-1.5 5.35,1.5
TO-220-5 [mm] "TO, Thru-Hole, Vertical, Heatsink Mounted; 5 In-Line Leads; Pitch 1.70 mm"
  rect 1.45x1.45 hole 1: 1(-3.4,0)
  round 1.45 hole 1: 2(-1.7,0) 3(0,0) 4(1.7,0) 5(3.4,0)
  silkscreen extent -5.35,-1.5 5.35,1.5
TO-220RF_dual [mm] "modified TO-220 to accept mitsubishi and IRF transistors"
  rect 2x2 hole 1.27: 1(-2.54,0)
  round 2 hole 1.27: 2(0,0) 3(2.54,0)
  round 1.6 hole 1: 2(2.54,-2.54) 3(0,-2.54)
  silkscreen extent -3.75,-3.75 3.75,1.25
TO-252 [mm] "Plastic flagne mount package"
  rect 3.2x1 smd: 1(-5.6,2.2) 3(-5.6,-2.2)
  rect 6.2x5.4 smd: 2(1.5,0)
  silkscreen extent -7.6,-3.85 4.8,3.85

## Part data
C1 C1a C1b C2 C2a C2b C2c C2d C3 C4 C5 C6 C7 C8 C9 C10 C11 C12 C13 C14 C15 C16 C17 C18 C19 C20 C21 C22 C23 C24 C25 C26 C28a C29a C31 C32 C33 C33a C33b C34 C35 C36 C42 C45 C46 C47 C48 C49 C50 C51 C52 C53 C54 C55 C56 C57 C58 C59 C60 C61 C62 C63 C63a C65 C66 C67 C70 C72 C74 C75 C77 C82 C83 C88 C89 C94 C95 C107 C107a C108 C108a C113 C114 C116 C126 C127 C129: library part CAP, "Capacitor"
  C1 C1a C1b C2 C2a C2b C2c C2d C3 C4 C5 C6 C19 C20 C21 C22 C23 C24 C25 C26 C34 C36 C42 C61 C62 C63 C63a C65 C66 C67 C72 C75 C77 C88 C89 C113 C114 C116 C126 C127 C129: Order="FN 252-2090", Price=0.068, QT Order=QCC-00154
  C7 C15: Order="FN 221-0934", Price=0.124
  C8 C16: Order="FN 174-0649", Price=0.074, QT Order=QCC-00147
  C9 C12 C17 C51 C55 C70 C74: Order="FN 233-2701", Price=0.078, QT Order=QCC-00125
  C10 C13 C18 C47 C59: Order="FN 233-2756", Price=0.058, QT Order=QCC-00084
  C11 C50 C54: Order="FN 228-0662", Price=0.074
  C14: Order="FN 174-0656", Price=0.074, QT Order=QCC-00069
  C28a C29a C32 C33 C33a C33b: Order="FN 136-2553", Price=0.01, QT Order=QCC-00259
  C31 C35: Order="FN 233-2713", Price=0.059, QT Order=QCC-00097
  C45 C57: Order="FN 141-4693", Price=0.063
  C46 C58: Order="FN 233-2698", Price=0.078
  C48 C60 C107 C107a C108 C108a: Order="FN 233-2692", Price=0.056
  C49 C53: Order="FN 221-0933", Price=0.143
  C52 C56: Order="FN 498-609", Price=0.068
  C82 C83: Order="FN 184-5751", Price=0.115, QT Order=QCC-00103
  C94 C95: Order="FN 152-0303", Price=0.03, QT Order=QCC-00101
C27: library part CAP-POL, "Electrolitic capacitor", Voltage=25V, Order="FN 206-9181", Price=0.37, QT Order=QCC-00323
C28 C29 C40 C76 C76a C90 C105 C109 C110 C111 C112 C115 C128: library part CAP-POL, "Electrolitic capacitor", Order="FN 233-3009", Price=0.204, QT Order=QCC-00166
C30 C96 C96a C106a: library part CAP-POL, "Electrolitic capacitor", Voltage=16V, Order="FN 197-294", Price=0.235, QT Order=QCC-00202
C68 C69 C84 C85 C86 C87: library part CAP, "Capacitor", Voltage=100V/NPO, Order="FN 221-1120", Price=0.84
C78 C79 C80 C81 C91 C92 C93 C94a C97 C98 C99 C100 C101 C102 C103 C104 C106: library part CAP, "Capacitor", Voltage=100V
  C78: Order="FN 136-2553", Price=0.083, QT Order=QCC-00259
  C79 C80 C81 C91 C92 C93 C94a C97 C98 C99 C100 C101 C102 C103 C104 C106: Order="FN 252-2090", Price=0.068, QT Order=QCC-00154
D1 D5 D6: "DIODE, SCHOTTKY, 1A, 60V, SOD-123F", Order="FN 151-0694", Price=0.085, QT Order=QCD-00034
D2: "DIODE, SCHOTTKY, DUAL", Order="FN 108-1191", Price=0.024
D2a D2b: "Small Signal Diode, Dual Series", Order="FN 162-1837", Price=0.0618
D3 D4: "MELF & HIPAX PIN Diod", Order="DK 1465-1236-1-ND", Price=2.20
DS1: "NEON LAMP, WIRE ENDED, T2", Order="FN 113-9250", Price=0.243
F1: library part Fuse, "Fuse", Function=Fuse, Order="FN 184-1065", Price=0.134, QT Order=QCI-00216
J1: library part POWER_JACK, "Power Jack", Function="12V Connector", Order="FN 188-9309", Price=0.83
J2 J3: library part Phonejack3, "Jack Socket,Thru-Hole", Order="FN 126-7376", Price=0.35
  J2: Function=Paddles
  J3: Function=ACC
K1 K2 K3 K4: "Single-winding Latching Relay", Order="FN 118-1070", Price=2.19
L1 L2 L3 L4 L5 L6 L7 L8 L9 L10 L11 L12: library part BPF_IND, "INDUCTOR SMD", Price=0.166
  L1 L6 L9: Order="FN 166-9889"
  L2 L7 L10: Order="FN 166-9882"
  L3 L11: Order="FN 166-9913"
  L4 L12: Order="FN 166-9911"
  L5: Order="FN 249-1624"
  L8: Order="FN 166-9915"
L13 L21: library part LPF_IND, "T37-2 handwound inductor", Inductance=2.4uH, Order="EB 400348182316", Price=0.20
L14 L22: library part LPF_IND, "T37-2 handwound inductor", Inductance=1.4uH, Order="EB 400348182316", Price=0.20
L15 L23: library part LPF_IND, "T37-2 handwound inductor", Inductance=0.58uH, Order="EB 400348182316", Price=0.20
L16 L24: library part LPF_IND, "T37-2 handwound inductor", Inductance=0.26uH, Order="EB 400348182316", Price=0.20
L17: library part LPF_IND, "T37-2 handwound inductor", Inductance=3uH, Order="EB 400348182316", Price=0.20
L18: library part LPF_IND, "T37-2 handwound inductor", Inductance=1.7uH, Order="EB 400348182316", Price=0.20
L19: library part LPF_IND, "T37-2 handwound inductor", Inductance=0.78uH, Order="EB 400348182316", Price=0.20
L20: library part LPF_IND, "T37-2 handwound inductor", Inductance=0.32uH, Order="EB 400348182316", Price=0.20
P1: "Header, 30-Pin", Order="EB 290947876334", Price=0.295
P2 P2a: library part BNC, "RF COAXIAL, BNC, JACK", Order="FN 171-2350", Price=0.69
P3: "Battery Terminal"
P7: library part "Header 2", "Header, 2-Pin", Checked=NA, Order="FN 168-3898", Price=5.57
P8: "Header, 2-Pin, Dual row", LatestRevisionDate=17-Jul-2002, LatestRevisionNote="Re-released for DXP Platform.", Publisher="Altium Limited"
Q1: "TRANSISTOR, RF, NPN, 12V, 0.035MA,SOT-23", Order="FN 108-1300", Price=0.161
Q3 Q4: "BIPOLAR, TRANSISTOR, NPN, SOT-89", Order="FN 171-3880", Price=0.221
Q5 Q6: "Silicon RF Power MOS FET", Order="EB 121171160336", Price=7.375
R1a R1b R1c R1d R2a R2b R2c R2d R3a R3b R3c R3d R9 R10 R11 R12 R13 R14 R15 R15a R15b R15c R15d R16 R17 R18 R20 R21 R22 R23 R24 R25 R31 R32 R33 R34 R35 R36 R37 R38 R39 R41 R42 R43 R44 R45 R46 R47 R48 R49 R50 R51 R52 R53 R54 R57 R58 R61 R62 R63 R64 R65 R66 R67 R68 R69 R70 R71 R72 R73 R74 R75 R76 R77 R78 R79 R80 R81 R82 R83 R83a R83b R84 R85 R86 R87 R88 R89 R90 R91 R100 R101 R102: library part RES, "Resistor"
  R1a R1b R1c R1d R2a R2b R2c R2d R10 R15a R20 R21 R36: Order="FN 200-8383", Price=0.024, QT Order=QCR-00341
  R3a R3b R3c R3d: Order="FN 146-9860", Price=0.021, QT Order=QCR-00373
  R9 R13: Order="FN 165-2920", Price=0.065, QT Order=QCR-00353
  R11 R15 R49 R50 R83b: Order="FN 157-6459", Price=0.061, QT Order=QCR-00326
  R12: Order="FN 188-7301", Price=0.043, QT Order=QCR-00343
  R14 R54: Order="FN 165-2998", Price=0.012, QT Order=QCR-00339
  R15b R15c R15d R16 R17 R18 R35 R41 R42 R43 R44 R46 R47 R51 R52 R71 R72: Order="FN 933-2375", Price=0.027, QT Order=QCR-00301
  R22 R23 R24 R25: Order="FN 933-3681", Price=0.009, QT Order=QCR-00268
  R31 R32 R33 R34 R102: Order="FN 205-7802", Price=0.017, QT Order=QCR-00427
  R37: Order="FN 165-2940", Price=0.036, QT Order=QCR-00329
  R38 R39 R83a: Order="FN 933-2421", Price=0.013, QT Order=QCR-00279
  R45 R48 R58 R62 R69 R70 R73 R74 R75 R76 R83 R100 R101: Order="FN 188-7289", Price=0.046, QT Order=QCR-00333
  R53 R81 R82: Order="FN 933-2804", Price=0.007, QT Order=QCR-00309
  R57 R61 R63 R64 R65 R66 R67 R68 R77 R79: Order="FN 173-8942", Price=0.052, QT Order=QCR-00293
  R78 R80: Order="FN 205-7665", Price=0.018, QT Order=QCR-00274
  R84 R85 R86 R87 R88 R89 R90 R91: Order="FN 146-9856", Price=0.021, QT Order=QCR-00349
RFC1 RFC2 RFC3 RFC4 RFC5 RFC6 RFC7 RFC9 RFC10 RFC11 RFC12: library part TDK-NLV25T, "INDUCTOR, SIGNAL LINE, 4.7UH, 1005", Order="FN 166-9895", Price=0.166
RFC8: library part FER_BEAD, Order="EB 300988432524", Price=0.298
T1 T4: "Wideband RF Transformer 1:4", Order="DK 553-1655-ND", Price=2.01
T2 T3: library part SWR_TR, "SWR Bridge transformer", Order="EB 300771069431", Price=0.795
T5: library part CX2074NL, "Transformer 4:1", Order="EB 300988432524", Price=0.298
T6: library part PA_TR_b, "BN43-202 bifilar transformer", Order="EB 291023830340", Price=0.534
T7: library part PA_TR_4m, "BN43-202 2:3 transformer", Order="EB 291023830340", Price=0.534
U1 U2 U15 U17: "Dual 4:1 Demux/Analog Switch", Order="FN 175-0447", Price=0.69
U3: "V REG ADJ +5/20V, 2941, TO-220-5", Order="FN 948-9371", Price=1.28
U4: "VOLTAGE REG, 40V, TO220-3", Order="FN 121-1135", Price=0.56
U5: library part UA78M33CKVURG3, "VOLT REG, 3.3V, TO-252", Order="FN 245-1041", Price=0.39
U6: "OPTOCOUPLER, SMDIP-4, TR O/P", Order="FN 168-3292", Price=0.26
U7: "Quad 2-input NOR gate", Order="FN 108-5298", Price=0.38
U8: "I2C programmable XO", Order="DK 336-2518-ND", Price=8.72
U10: "2-Wire High-Accuracy Temperature Sensor", Order="FN 143-9486", Price=1.05
U11: library part 74LCX74M, "Low Voltage Dual D-Type Positive Edge-Triggered  Flip-Flop with 5V Tolerant Inputs", Order="FN 985-3502", Price=0.23
U14: "BCD DECODER/DRIVER", Order="FN 959-2300", Price=1.22
U16: "High Speed, Single Supply OpAmp", Order="FN 110-1542", Price=4.67
U18: "100 mA, Adjustable Output,  LDO Voltage Regulator with  60 V Load Dump Protection", Order="FN 121-1100", Price=0.39
U19: "Low Power, Rail-To-Rail OpAmp", Order="FN 845-5171", Price=1.47
U20: library part HMS482ST89E, "MMIC AMPLIFIER", Order="FN 245-6527", Price=2.82
Q1a: Order="FN 984-6409", Price=0.31, QT Order=QCT-00010

## Free pads (board coordinates)
  round 118.11 hole 106.3: h1(2086.61,5511.81) h2(2086.61,3090.55) h3(9232.28,3090.55) h4(9232.28,5511.81)

## Via types
v1: diameter 30, hole 15, Top Layer to Bottom Layer, 739 vias

## Nets (pads, with @x,y where several pads share a name; then routed paths per layer and width w, separated by ;. In a path a pad name is that pad's centre, name@x,y a point inside that pad or via, vN(x,y) a via of type N, cw(c..) or ccw(c..) an arc to the next point about the centre after c; other vN are vias at no path point)
ADC1: C31.1 P1.11 R13.2 R14.1 | length 3002.5
  Top Layer w10: P1.11@7050,5525 7050,5468 7056,5462 v1@7758,5462 ; v1(7866,4074) 7914,4074 7980,4140 7980,4350 ; v1(7980,4770) 7866,4770 7860,4764 7860,4566 7878,4548 7908,4548 7920,4536 7920,4350 8094,4350 8100,4344 v1(8100,4320)
  Bottom Layer w10: v1(7758,5460) 7795,5460 7804,5451 7804,5437.23 7823.23,5418 7913.63,5418 7938.22,5393.41 7938.22,5258.78 7988,5209 7988,5030 7980,5022 v1(7980,4770) v1@7982,4772 ; C31.1@7799.78,4043.14 7835.14,4043.14 v1(7866,4074) 7942.92,4074 R14.1@7943.78,4073.14 ; R13.2@8075.14,4374.22 8075.14,4326.86 8082,4320 v1(8100,4320)
ANT: DS1.2 P2.1 P2a.1 T2.4 | length 1964.3
  Bottom Layer w20: T2.4@2430,3324 2430,3414 2300,3544 2095,3544 2081,3558 2081,4233 2151.57,4303.57 P2.1@2151.57,4506 2540.89,4506 P2a.1@2640,4506
ANT_RX_ON: R54.1 U7.2 U7.3 U7.4 | length 5977.4
  Top Layer w10: R54.1@4026,4883.37 R54.1@4044.86,4902.22 4044.86,4819.14 4172,4692 4356,4692 v1(4380,4716) ; v1@4548,3708 v1(4542,3708) 4542,3677.74 4607,3612.74 4607,3383.67 4656.67,3334 4861,3334 v1(4929,3266) ; v1(5022,3266) 5028,3266 5064,3302 5064,3413 5150,3499 5370,3499 5597,3726 6389.63,3726 6421.63,3758 v1(6464,3758) 6464,3759 v1@6470,3765 ; v1(6610,3830) 6610,3804 6613,3801 7185,3801 7407,4023 7635,4023 7676,4064 7721,4064 7742,4085 7742,4224 7768,4250 U7.2@7818,4250 U7.3@7818,4300 U7.4@7818,4350
  Bottom Layer w10: v1(4380,4716) 4422,4716 4564,4574 4564,3730 v1(4542,3708) ; v1(4929,3266) v1(5022,3266) ; v1(6464,3758) 6464,3791 6473,3800 6602,3800 6610,3808 v1(6610,3830)
ANT_TX_ON: R53.2 U7.1 | length 5276.3
  Top Layer w10: R53.2@4409.14,4793.78 4470,4732.92 v1(4470,4716) ; v1(4591,3679) 4605.14,3664.86 4605.14,3637.22 4623,3619.36 4623,3390.3 4663.3,3350 4885,3350 v1(4929,3306) ; v1(5022,3306) 5032,3306 5048,3322 5048,3420 5143,3515 5358,3515 5585,3742 6383,3742 v1(6432,3791) v1@6434,3793 ; v1(6570,3829) 6570,3810 6595,3785 7192,3785 7413,4006 7640.63,4006 7682.63,4048 7727.63,4048 7758,4078.37 7758,4193 7765,4200 U7.1@7818,4200 U7.1@7824,4194
  Bottom Layer w10: v1(4470,4716) 4470,4692 4580,4582 4580,3698 4591,3687 v1(4591,3679) ; v1(4929,3306) v1(5022,3306) ; v1(6432,3791) 6432,3792 6469,3829 v1(6570,3829)
B1: C1.2 R3a.1 U1.7 | length 319.3
  Top Layer w10: R3a.1@5729.78,3212.86 5752.92,3236 v1(5802,3236)
  Bottom Layer w10: U1.7@5748,3302 5748,3248 5760,3236 v1(5802,3236) 5826,3236 5838,3248 5838,3278 5850.86,3290.86 C1.2@5886.22,3290.86
B2: C2.2 R3b.2 U1.9 | length 370
  Top Layer w10: R3b.2@5874.22,3217.14 5904.86,3217.14 5922,3200 v1(5922,3104)
  Bottom Layer w10: U1.9@5798,3082 5922,3082 ; v1(5922,3104) 5922,3082 ; C2.2@5993.78,3085.14 5990.63,3082 5922,3082